# Altium PCB phone_cover_layout.PcbDoc
Units mm, origin at the board's own origin, x right, y up, seen from the top; angles counter-clockwise.
Board outline 43.69 x 67.82 mm, 2 copper layers (Top Layer, Bottom Layer); 76 components, 40 nets, 288 pads, 44 vias.
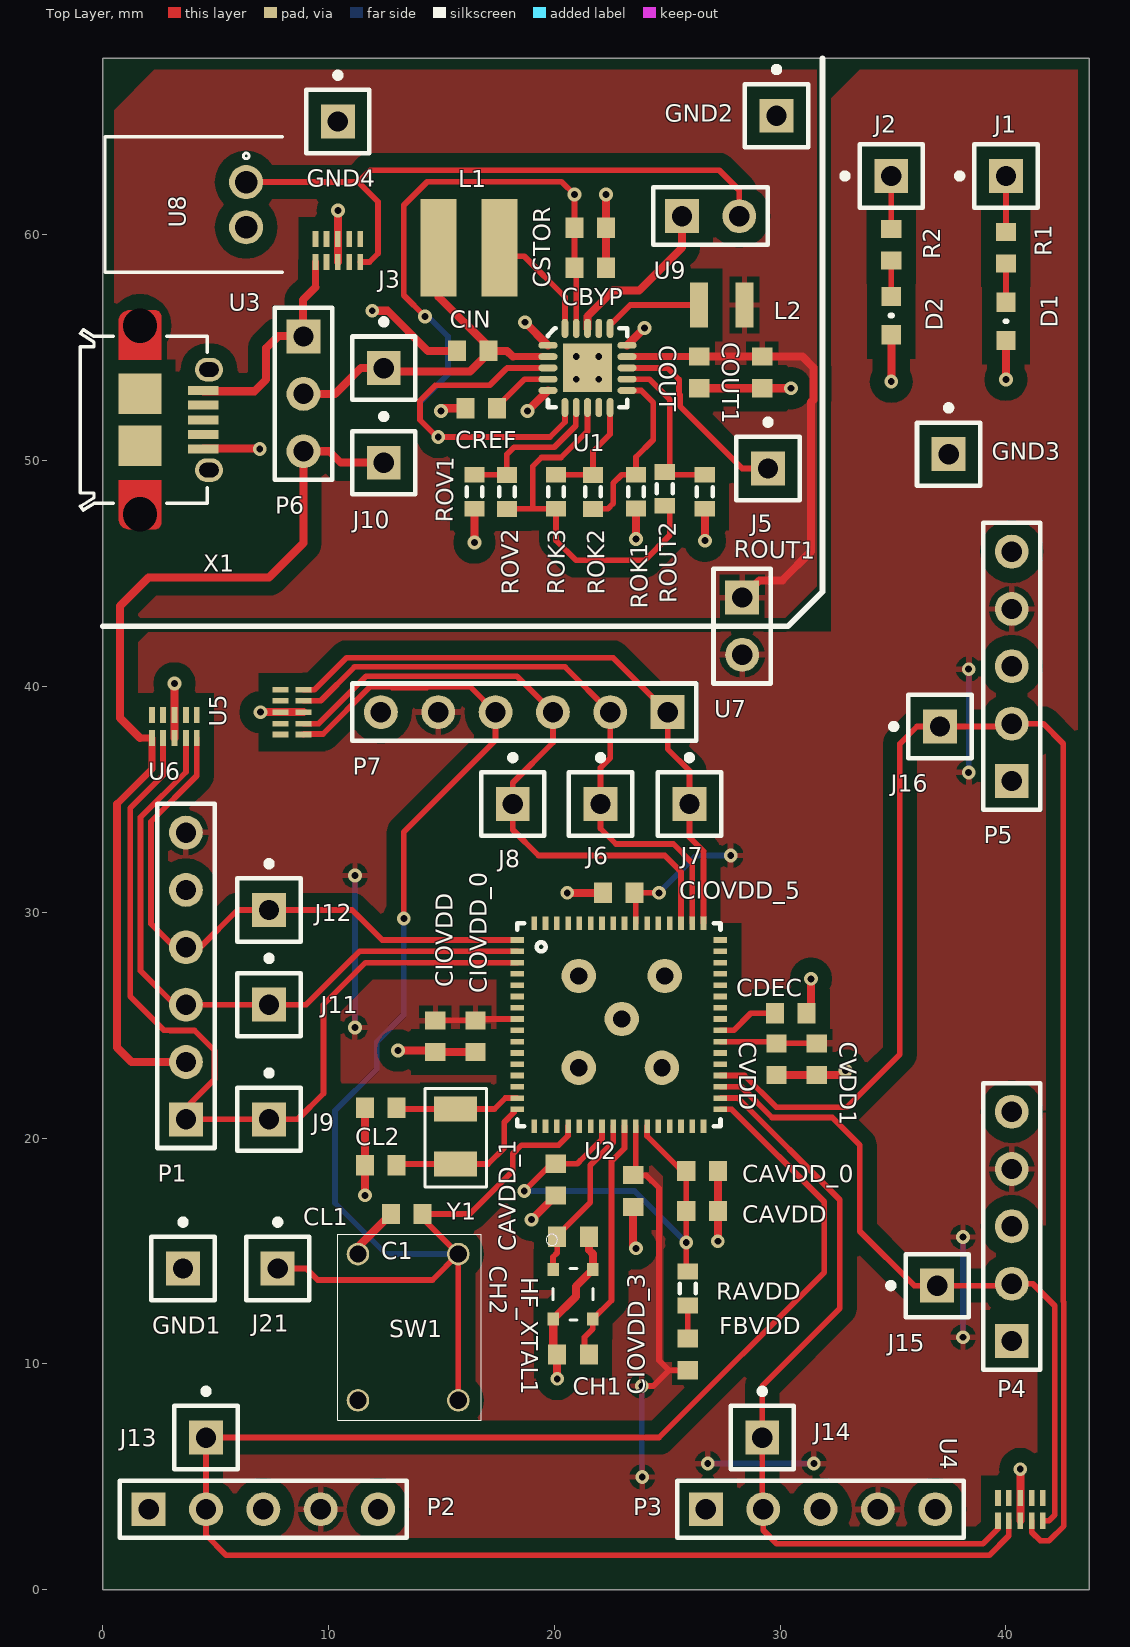
[diagram p0: Top Layer view]
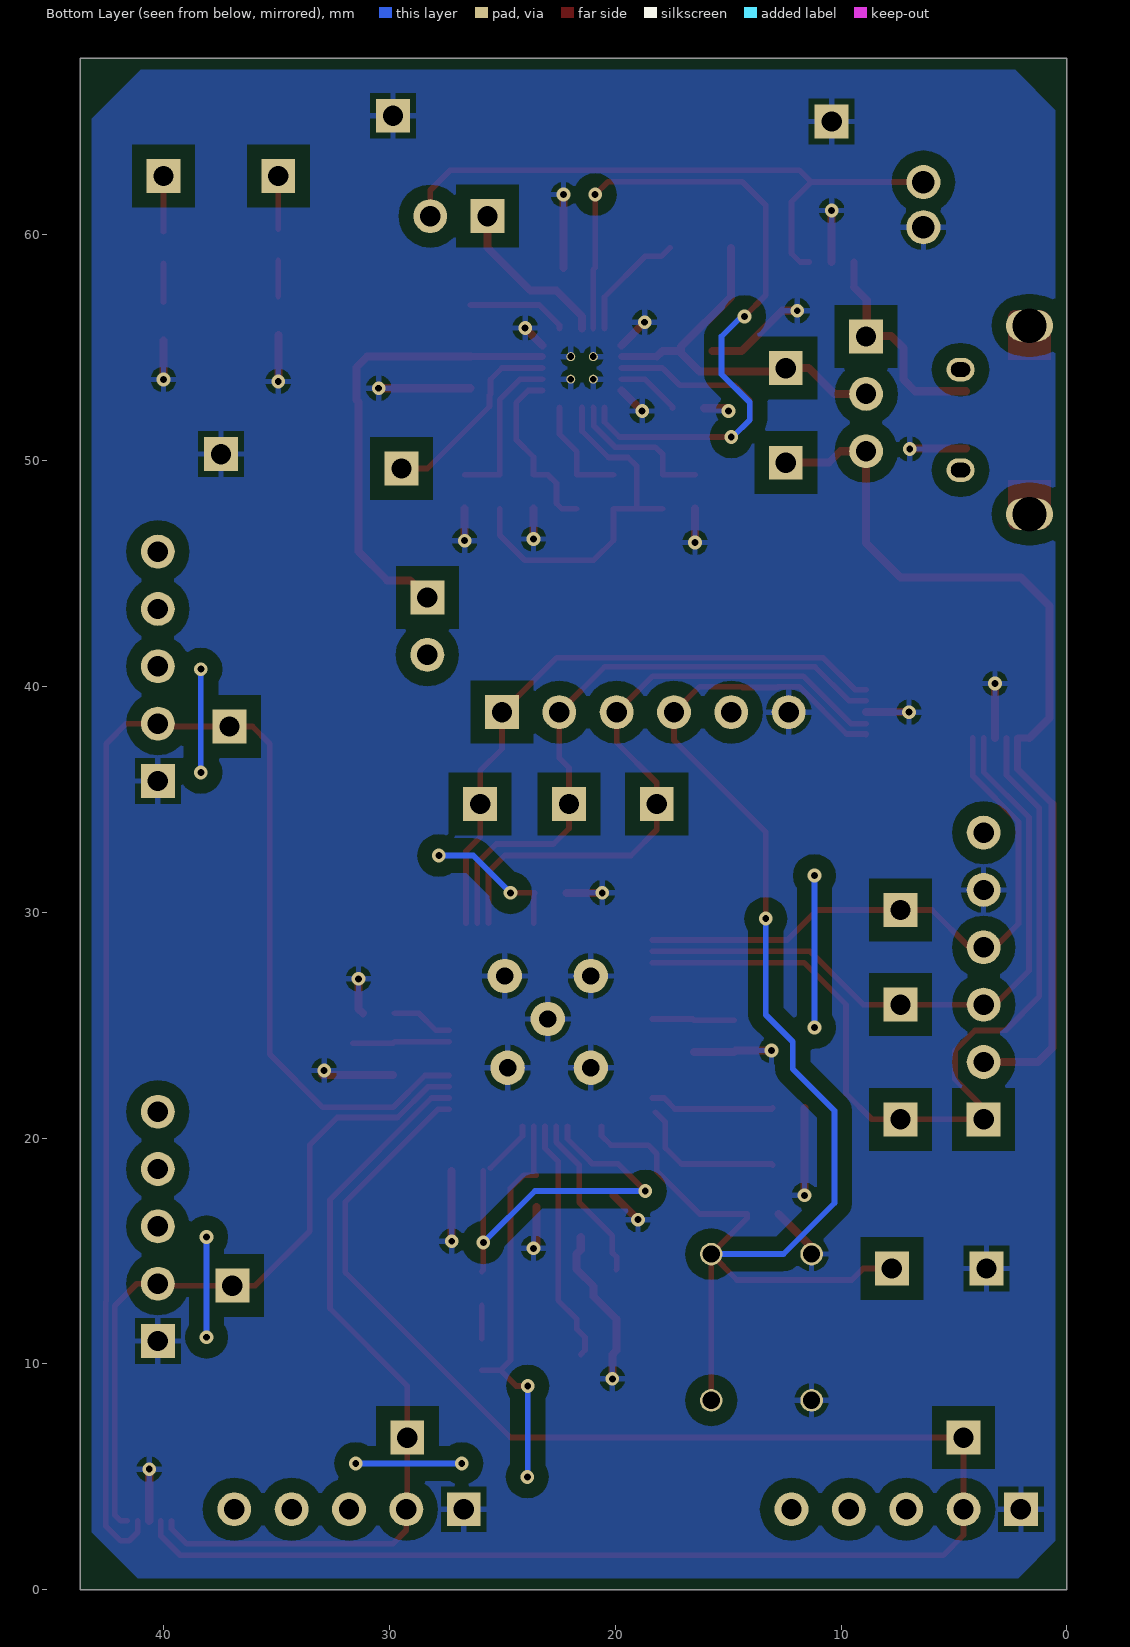
[diagram p1: Bottom Layer view, seen from below]

## Layer stack, top to bottom
Top Solder: solder mask 0.0102, Solder Resist, Dk 3.5
Top Layer: signal copper 0.0356
Dielectric 1: dielectric 0.32, FR-4, Dk 4.8
Bottom Layer: signal copper 0.0356
Bottom Solder: solder mask 0.0102, Solder Resist, Dk 3.5

## Board outline
0,0 43.688,0 43.688,67.818 0,67.818

## Design rules (kind name [scope] priority, off if disabled: settings)
Clearance [All] p1: gap=0.254 ignorepadtopadclearanceinfootprint=TRUE except(0: Arc-Hole Track-Hole SMDPad-Hole THPad-Hole Via-Hole Fill-Hole Poly-Hole Region-Hole Text-Hole; 0.152: Arc-SMDPad Track-Track Track-SMDPad SMDPad-SMDPad; 0.203: Arc-Track; 0.508: Arc-Via Track-Via THPad-Via Via-Via; 0.635: Arc-Poly Track-Poly SMDPad-Poly THPad-Poly Via-Poly Fill-Poly Poly-Poly)
HoleSize [All] p1: absolutevalues=TRUE maxlimit=2.54 minlimit=0.3 maxpercent=80.000 minpercent=20.000
MinimumSolderMaskSliver MinimumSolderMaskSliver_ESD [HasFootprint('SON50P100X255X50-10N')] p1: minsoldermaskwidth=0.025
MinimumSolderMaskSliver [All] p2: minsoldermaskwidth=0.025
PolygonConnect [All] p1: connectstyle=Relief reliefconductorwidth=0.254 reliefentries=4 polygonreliefangle="90 Angle" airgapwidth=0.254
RoutingVias [All] p1: holewidth=0.305 width=0.61 viastyle="Through Hole" minholewidth=0.254 minwidth=0.508 maxholewidth=0.356 maxwidth=0.711
ShortCircuit ShortCircuit_USB [InComponent('X1')] p1: allowed=TRUE
ShortCircuit [All] p2: allowed=FALSE
SilkToSolderMaskClearance SilkToSolderMaskClearance_XTAL [InComponent('HF_XTAL1')] p1: minsilkscreentomaskgap=0 clearancetoexposedcopper=TRUE
SilkToSolderMaskClearance [IsPad] p2: minsilkscreentomaskgap=0.076 clearancetoexposedcopper=TRUE
SolderMaskExpansion [All] p1: expansion=0.102
Width Width_Power [(InNet('GND') OR InNet('VBAT') OR InNet('VIN_DC') OR InNet('VIN_USB') OR InNet('VOUT') OR InNet('VOUT_NFC'))] p1: maxlimit=0.356 minlimit=0.305 preferedwidth=0.356
Width Width_Signal [All] p2: maxlimit=0.305 minlimit=0.203 preferedwidth=0.254
26 further rules are at their usual default settings.

## Classes and differential pairs
component class MCU: C1 CAVDD CAVDD_0 CAVDD_1 CDEC CH1 CH2 CIOVDD CIOVDD_0 CIOVDD_3 CIOVDD_5 CL1 CL2 CVDD CVDD1 FBVDD HF_XTAL1 J21 RAVDD SW1 U2 Y1
component class Peripherals: GND1 GND2 GND3 GND4 J6 J7 J8 J9 J10 J11 J12 J13 J14 J15 J16 P1 P2 P3 P4 P5 P7 U3 U4 U5 U6
component class Power: CBYP CIN COUT COUT1 CREF CSTOR D1 D2 J1 J2 J3 J5 L1 L2 P6 R1 R2 ROK1 ROK2 ROK3 ROUT1 ROUT2 ROV1 ROV2 U1 U7 U8 U9 X1

## Components (designator, comment, footprint, x,y, rotation, side; value= is the part's Value field where it differs from the comment)
C1 "Cap Semi" 1608[0603] 13.462,16.637 r0 top value=0.1uF
CAVDD "Cap Semi" 1608[0603] 26.543,16.764 r180 top value=10uF
CAVDD_0 "Cap Semi" 1608[0603] 26.543,18.542 r180 top value=10nF
CAVDD_1 "Cap Semi" 1608[0603] 20.066,18.161 r90 top value=10nF
CBYP "Cap Semi" 1608[0603] 21.59,58.547 r180 top value=100pF
CDEC "Cap Semi" 1608[0603] 30.48,25.527 r180 top value=1uF
CH1 "Cap Semi" 1608[0603] 20.828,10.414 r0 top value=1uF
CH2 "Cap Semi" 1608[0603] 20.828,15.621 r180 top value=1uF
CIN "Cap Semi" 1608[0603] 16.383,54.864 r180 top value=4.7uF
CIOVDD "Cap Semi" 1608[0603] 14.732,24.511 r90 top value=10uF
CIOVDD_0 "Cap Semi" 1608[0603] 16.51,24.511 r90 top value=0.1uF
CIOVDD_3 "Cap Semi" 1608[0603] 23.495,17.653 r90 top value=0.1uF
CIOVDD_5 "Cap Semi" 1608[0603] 22.86,30.861 r0 top value=0.1uF
CL1 "Cap Semi" 1608[0603] 12.319,18.796 r0 top value=1uF
CL2 "Cap Semi" 1608[0603] 12.319,21.336 r0 top value=1uF
COUT "Cap Semi" 1608[0603] 26.416,53.91 r90 top value=100pF
COUT1 "Cap Semi" 1608[0603] 29.21,53.91 r90 top value=10uF
CREF "Cap Semi" 1608[0603] 16.764,52.324 r0 top value=10nF
CSTOR "Cap Semi" 1608[0603] 21.59,60.325 r180 top value=100pF
CVDD "Cap Semi" 1608[0603] 29.845,23.495 r90 top value=10uF
CVDD1 "Cap Semi" 1608[0603] 31.623,23.495 r90 top value=0.1uF
D1 "LED0" LED1 40.005,56.173 r270 top
D2 "LED0" LED1 34.925,56.427 r270 top
FBVDD "Inductor" 1608[0603] 25.908,10.414 r270 top value=1kohm
GND1 "Socket" PIN1 3.556,14.224 r0 top
GND2 "Socket" PIN1 29.845,65.278 r0 top
GND3 "Socket" PIN1 37.465,50.292 r0 top
GND4 "Socket" PIN1 10.414,65.024 r0 top
HF_XTAL1 "Crystal_OSC" HFXTAL 20.828,13.081 r270 top
J1 "Socket" PIN1 40.005,62.611 r90 top
J2 "Socket" PIN1 34.925,62.611 r90 top
J3 "Socket" PIN1 12.446,54.102 r0 top
J5 "Socket" PIN1 29.464,49.657 r0 top
J6 "Socket" PIN1 22.047,34.798 r0 top
J7 "Socket" PIN1 25.984,34.798 r0 top
J8 "Socket" PIN1 18.161,34.798 r0 top
J9 "Socket" PIN1 7.366,20.828 r0 top
J10 "Socket" PIN1 12.446,49.911 r0 top
J11 "Socket" PIN1 7.366,25.908 r0 top
J12 "Socket" PIN1 7.366,30.099 r0 top
J13 "Socket" PIN1 4.572,6.731 r0 top
J14 "Socket" PIN1 29.21,6.731 r0 top
J15 "Socket" PIN1 36.957,13.462 r90 top
J16 "Socket" PIN1 37.084,38.227 r90 top
J21 "Socket" PIN1 7.747,14.224 r0 top
L1 "Inductor" IND_22uH 16.129,59.182 r90 top value="22 uH"
L2 "Inductor" IND_10uH 25.248,56.896 r180 top value=10uH
P1 "Header 6" HDR1X6 3.683,20.828 r90 top
P2 "Touch1" HDR1X5 2.032,3.556 r0 top
P3 "Touch2" HDR1X5 26.712,3.556 r0 top
P4 "Touch3" HDR1X5 40.259,11.007 r90 top
P5 "Touch4" HDR1X5 40.259,35.814 r90 top
P6 "Header 3" HDR1X3 8.89,55.499 r270 top
P7 "Header 6" HDR1X6 25.019,38.862 r180 top
R1 "Res1" 1608[0603] 40.005,59.436 r90 top
R2 "Res1" 1608[0603] 34.925,59.563 r90 top
RAVDD "Res3" J1-0603 25.908,13.335 r270 top value=1ohm
ROK1 "Res3" J1-0603 23.622,48.629 r90 top value=4.12M
ROK2 "Res3" J1-0603 21.717,48.617 r90 top value=8.25M
ROK3 "Res3" J1-0603 20.077,48.625 r270 top value=634K
ROUT1 "Res3" J1-0603 26.67,48.625 r90 top value=5.23M
ROUT2 "Res3" J1-0603 24.892,48.756 r270 top value=7.77M
ROV1 "Res3" J1-0603 16.463,48.625 r90 top value=5.62M
ROV2 "Res3" J1-0603 17.907,48.617 r270 top value=7.32M
SW1 "Switch-PTS645" Switch 13.589,11.938 r90 top
U1 "BQ25570RGRR" QFN50P350X350X100-21N 21.471,54.11 r0 top
U2 "EFM32G232F128-QFP64" QFN-64 22.86,25.019 r0 top
U3 "IP4292CZ10-TBR" SON50P100X255X50-10N 10.414,59.309 r90 top
U4 "IP4292CZ10-TBR" SON50P100X255X50-10N 40.64,3.556 r90 top
U5 "IP4292CZ10-TBR" SON50P100X255X50-10N 8.382,38.862 r180 top
U6 "IP4292CZ10-TBR" SON50P100X255X50-10N 3.175,38.227 r90 top
U7 "Header 2" HDR1X2 28.321,43.942 r270 top
U8 "JST_Conn" JST 6.35,61.341 r0 top
U9 "Header 2" HDR1X2 25.654,60.833 r0 top
X1 "MicroB" 629105150921 1.651,51.809 r270 top
Y1 "XTAL" LFXTAL 15.621,20.066 r90 top

## Footprints (in the part's own frame and the unit in brackets; to place one, negate y for a bottom-side part, rotate by r counter-clockwise, add the part's x,y. Pads: shape width x height; smd on the part's side, far side on the other; paste and mask are expansions set on the pad)
1608[0603] [mm] "Chip Capacitor, Body 1.6x0.8mm, IPC High Density"
  rect 0.8x0.9 smd: 1(-0.7,0) 2(0.7,0)
  body extent -0.87,-0.48 0.87,0.48, height 1.3
629105150921 [mm]
  rect 0.4x1.35 smd: 1(-1.3,2.805) 2(-0.65,2.805) 3(0,2.805) 4(0.65,2.805) 5(1.3,2.805)
  oval 1.05x1.25 hole 0.65 slot 0.85 at 90 deg: S1(-2.225,3.055) S2(2.225,3.055)
  round 0 / inner round 0 / far side oval 1.4x2.1 hole 1.524: S3(-4.175,0) S6(4.175,0)
  rect 1.8x1.9 smd: S4(-1.15,0) S5(1.15,0)
  Top Layer region: -4.353,-0.95 -4.452,-0.95 -4.636,-0.874 -4.776,-0.733 -4.852,-0.549 -4.852,-0.45 -4.852,-0.45 -4.852,0.65 -4.852,0.71 -4.807,0.82 -4.722,0.904 -4.612,0.95 -4.553,0.95 -4.553,0.95 -2.668,0.95 -2.668,-0.95
  Top Layer region: 4.353,-0.95 4.452,-0.95 4.636,-0.874 4.776,-0.733 4.852,-0.549 4.852,-0.45 4.852,-0.45 4.852,0.65 4.852,0.71 4.807,0.82 4.722,0.904 4.612,0.95 4.553,0.95 4.553,0.95 2.668,0.95 2.668,-0.95
  silkscreen extent -4,-2.64 4,2.97, body extent -4.3,-2.64 4.3,3.23, height 2.78
HDR1X2 [mm] "Connector; Header; 2 Position"
  rect 1.5x1.5 hole 0.9: 1(0,0)
  round 1.5 hole 0.9: 2(2.54,0)
  silkscreen extent -1.27,-1.27 3.81,1.27
HDR1X3 [mm] "Connector; Header; 3 Position"
  rect 1.5x1.5 hole 0.9: 1(0,0)
  round 1.5 hole 0.9: 2(2.54,0) 3(5.08,0)
  silkscreen extent -1.27,-1.27 6.35,1.27
HDR1X5 [mm] "Connector; Header; 5 Position"
  rect 1.5x1.5 hole 0.9: 1(0,0)
  round 1.5 hole 0.9: 2(2.54,0) 3(5.08,0) 4(7.62,0) 5(10.16,0)
  silkscreen extent -1.27,-1.27 11.43,1.27
HDR1X6 [mm] "Connector; Header; 6 Position"
  rect 1.5x1.5 hole 0.9: 1(0,0)
  round 1.5 hole 0.9: 2(2.54,0) 3(5.08,0) 4(7.62,0) 5(10.16,0) 6(12.7,0)
  silkscreen extent -1.27,-1.27 13.97,1.27
HFXTAL [mm]
  rect 0.57x0.49 smd: 1(-1.1,-0.875) 2(1.1,-0.875) 3(1.1,0.875) 4(-1.1,0.875)
  silkscreen extent -2.66,-1.19 1.14,0.89
IND_10uH [mm]
  rect 0.8x2 smd: 1(-3.175,0) 2(-1.168,0)
IND_22uH [mm]
  rect 4.3x1.6 smd: 1(0.25,1.25) 2(0.25,-1.45)
J1-0603 [mm] "Chip Resistor, Body 1.6x0.8mm, IPC High Density"
  rect 0.7x0.9 smd: 1(-0.75,0) 2(0.75,0)
  silkscreen extent -0.2,-0.35 0.2,0.35, body extent -0.85,-0.48 0.85,0.48, height 0.9
JST [mm]
  round 1.508 hole 1: 1(0,1) 2(0,-1)
  silkscreen extent -6.25,-3 1.6,3
LED1 [mm]
  rect 0.85x0.85 smd: 1(-0.85,0) 2(0.85,0)
  silkscreen extent 0,-0.03 0,0.03
LFXTAL [mil]
  rect 43x75 smd: 1(-48,0) 2(48,0)
  silkscreen extent -88,-54 84,53
PIN1 [mm] "Connector; Plug"
  rect 1.5x1.5 hole 0.9: 1(0,0)
  silkscreen extent -1.4,-1.4 1.4,2.17
QFN50P350X350X100-21N [mm]
  oval 0.85x0.3 smd: 1(-1.75,1) 2(-1.75,0.5) 3(-1.75,0) 4(-1.75,-0.5) 5(-1.75,-1) 11(1.75,-1) 12(1.75,-0.5) 13(1.75,0) 14(1.75,0.5) 15(1.75,1)
  oval 0.3x0.85 smd: 6(-1,-1.75) 7(-0.5,-1.75) 8(0,-1.75) 9(0.5,-1.75) 10(1,-1.75) 16(1,1.75) 17(0.5,1.75) 18(0,1.75) 19(-0.5,1.75) 20(-1,1.75)
  rect 2.15x2.15 smd: 21(0,0)
  round 0.4 hole 0.3: 22(-0.5,0.5) 23(-0.5,-0.5) 24(0.5,-0.5) 25(0.5,0.5)
  silkscreen extent -1.75,-1.75 1.75,1.75
QFN-64 [mm]
  rect 0.6x0.25 smd: 1(-4.5,3.75) 2(-4.5,3.25) 3(-4.5,2.75) 4(-4.5,2.25) 5(-4.5,1.75) 6(-4.5,1.25) 7(-4.5,0.75) 8(-4.5,0.25) 9(-4.5,-0.25) 10(-4.5,-0.75) 11(-4.5,-1.25) 12(-4.5,-1.75) 13(-4.5,-2.25) 14(-4.5,-2.75) 15(-4.5,-3.25) 16(-4.5,-3.75) 33(4.5,-3.75) 34(4.5,-3.25) 35(4.5,-2.75) 36(4.5,-2.25) 37(4.5,-1.75) 38(4.5,-1.25) 39(4.5,-0.75) 40(4.5,-0.25) 41(4.5,0.25) 42(4.5,0.75) 43(4.5,1.25) 44(4.5,1.75) 45(4.5,2.25) 46(4.5,2.75) 47(4.5,3.25) 48(4.5,3.75)
  rect 0.25x0.6 smd: 17(-3.75,-4.5) 18(-3.25,-4.5) 19(-2.75,-4.5) 20(-2.25,-4.5) 21(-1.75,-4.5) 22(-1.25,-4.5) 23(-0.75,-4.5) 24(-0.25,-4.5) 25(0.25,-4.5) 26(0.75,-4.5) 27(1.25,-4.5) 28(1.75,-4.5) 29(2.25,-4.5) 30(2.75,-4.5) 31(3.25,-4.5) 32(3.75,-4.5) 49(3.75,4.5) 50(3.25,4.5) 51(2.75,4.5) 52(2.25,4.5) 53(1.75,4.5) 54(1.25,4.5) 55(0.75,4.5) 56(0.25,4.5) 57(-0.25,4.5) 58(-0.75,4.5) 59(-1.25,4.5) 60(-1.75,4.5) 61(-2.25,4.5) 62(-2.75,4.5) 63(-3.25,4.5) 64(-3.75,4.5)
  silkscreen extent -4.5,-4.5 4.5,4.5
SON50P100X255X50-10N [mil]
  rect 28x10 smd: 1(-20,39) 2(-20,20) 3(-20,0) 4(-20,-20) 5(-20,-39) 6(20,-39) 7(20,-20) 8(20,0) 9(20,20) 10(20,39)
Switch [mil]
  round 39.37 hole 30: 1(-140,90) 2(115,90) 3(-140,-85) 4(115,-85)
  silkscreen extent -175,-125 150,125

## Part data
C1 CAVDD CAVDD_0 CAVDD_1 CBYP CDEC CH1 CH2 CIN CIOVDD CIOVDD_0 CIOVDD_3 CIOVDD_5 CL1 CL2 COUT COUT1 CREF CSTOR CVDD CVDD1: "Capacitor (Semiconductor SIM Model)", LatestRevisionDate=29-May-2009, LatestRevisionNote="IPC-7351 Footprint Added.", PackageDescription="Chip Capacitor", PackageReference=C1206, Published=8-Jun-2000, Publisher="Altium Limited"
D1 D2: "Typical INFRARED GaAs LED", Digi-Key Part Number=P13484CT-ND, Manufacturer="Panasonic Electronic Components", Manufacturer Part Number=LNJ926W8CRA, Component URL=https://industrial.panasonic.com/content/data/SC/ds/ds4/LNJ926W8CRA_E.pdf, Component URL Description=Datasheet
HF_XTAL1: Digi-Key Part Number=1253-1120-1-ND, Manufacturer="AVX Corp/Kyocera Corp", Manufacturer Part Number=CX2016DB40000D0FLJCC, Component URL=https://media.digikey.com/pdf/Data%20Sheets/Optrex%20PDFs/CX2016DB_Series_Spec.pdf, Component URL Description=Datasheet
P1 P7: "Header, 6-Pin", LatestRevisionDate=17-Jul-2002, LatestRevisionNote="Re-released for DXP Platform.", Publisher="Altium Limited"
P2 P3 P4 P5: library part "Header 5", "Header, 5-Pin", LatestRevisionDate=17-Jul-2002, LatestRevisionNote="Re-released for DXP Platform.", Publisher="Altium Limited"
P6: "Header, 3-Pin", LatestRevisionDate=17-Jul-2002, LatestRevisionNote="Re-released for DXP Platform.", Publisher="Altium Limited"
R1 R2: "Resistor", Digi-Key Part Number=311-143HRCT-ND, Manufacturer=Yageo, Manufacturer Part Number=RC0603FR-07143RL, Component URL=http://www.yageo.com/documents/recent/PYu-RC_Group_51_RoHS_L_8.pdf, Component URL Description=Datasheet
RAVDD ROK1 ROK2 ROK3 ROUT1 ROUT2 ROV1 ROV2: "Resistor", LatestRevisionDate=29-May-2009, LatestRevisionNote="IPC-7351 Footprint Added.", PackageDescription="Chip Resistor", PackageReference=J1-0603, Published=8-Jun-2000, Publisher="Altium Limited"
SW1: Digi-Key Part Number=CKN9112CT-ND, Manufacturer=C&K, Manufacturer Part Number="PTS645SM43SMTR92 LFS", Component URL=http://www.ckswitches.com/media/1471/pts645.pdf, Component URL Description=Datasheet
U1: "Ultra Low Power Harvester Power Management IC with Boost Charger, and Nanopower Buck Converter 20-VQFN", Package="VQFN-20 Texas Instruments", Availability=Unavailable, MF="Texas Instruments", MP=BQ25570RGRR, Price=None, SnapEDA_Link=https://www.snapeda.com/parts/BQ25570RGRR/Texas%20Instruments/view-part/?ref=snap
U2: "MCU 32-bit EFM32 ARM Cortex M3 RISC 128KB Flash 2.5V/3.3V 64-Pin TQFP T/R", Package="TQFP-64 Silicon Labs", Availability=Unavailable, MF="Silicon Labs", MP=EFM32G232F128-QFP64, Price=None, SnapEDA_Link=https://www.snapeda.com/parts/EFM32G232F128-QFP64/Silicon%20Labs/view-part/?ref=snap
U3 U4 U5 U6: "DIODE, ESD, 4 CH, USB, HDMI, SOT1176; Diode Type: ESD Protection; Operating Voltage: 5.5V; No. of Pins: 10", Package=None, Availability=Unavailable, MF="NXP Semiconductors", MP=IP4292CZ10-TBR, Price=None, SnapEDA_Link=https://www.snapeda.com/parts/IP4292CZ10-TBR/NXP%20Semiconductors/view-part/?ref=snap
U7 U9: "Header, 2-Pin", LatestRevisionDate=17-Jul-2002, LatestRevisionNote="Re-released for DXP Platform.", Publisher="Altium Limited"
X1: library part USBMICRO_20329, "USB ConnectorsUSBMINIB - Surface Mount Female Mini-B USB Connector    4UConnector: 06564", Manufacturer="Amphenol FCI", ManufacturerPartNo=10103594-0001LF, SupplierPartNo=609-4050-1-ND, ComponentLink1Description=Datasheet, ComponentLink1URL=http://cdn.amphenol-icc.com/media/wysiwyg/files/documentation/datasheet/inputoutput/io_usb_micro.pdf, Supplier=Digi-Key, SupplierLink1URL=https://www.digikey.com/product-detail/en/amphenol-fci/10103594-0001LF/609-4050-1-ND/2350357
Y1: "Crystal Oscillator", Digi-Key Part Number=535-9543-1-ND, Manufacturer="Abracon LLC", Manufacturer Part Number=ABS07-32.768KHZ-7-T, Component URL=http://www.abracon.com/Resonators/ABS07.pdf, Component URL Description=Datasheet
FBVDD L1 L2: Code_IEC=1005, Code_JEITA=0402, LatestRevisionDate=29-May-2009, LatestRevisionNote="IPC-7351 Footprint Added.", PackageDescription="Chip Inductor", PackageReference=0402-A, Published=8-Jun-2000, Publisher="Altium Limited"
GND1 GND2 GND3 GND4 J1 J2 J3 J5 J6 J7 J8 J9 J10 J11 J12 J13 J14 J15 J16 J21: LatestRevisionDate=17-Jul-2002, LatestRevisionNote="Re-released for DXP Platform.", Publisher="Altium Limited"

## Free pads (board coordinates)
  round 1.524 hole 0.762: 7(21.082,27.178) 8(24.892,27.178) 9(21.082,23.114) 10(24.765,23.114) 11(22.987,25.273)

## Via types
v1: diameter 0.61, hole 0.305, Top Layer to Bottom Layer, 44 vias

## Nets (pads, with @x,y where several pads share a name; then routed paths per layer and width w, separated by ;. In a path a pad name is that pad's centre, name@x,y a point inside that pad or via, vN(x,y) a via of type N, cw(c..) or ccw(c..) an arc to the next point about the centre after c; other vN are vias at no path point)
AVDD_0: CAVDD.2 CAVDD_0.2 CAVDD_1.2 RAVDD.1 U2.23 U2.27 | length 20
  Top Layer w0.254: v1(18.669,17.653) 19.877,18.861 CAVDD_1.2 21.02,18.861 21.133,18.974 21.133,18.985 22.11,19.963 U2.23 ; U2.27 24.11,20.086 CAVDD_0.2@25.527,18.669 ; CAVDD_0.2 CAVDD.2 v1(25.843,15.367) 25.843,14.15 RAVDD.1
  Bottom Layer w0.254: v1(18.669,17.653) 23.557,17.653 v1(25.843,15.367)
FD: J9.1 P1.1 U2.3 U6.2 | length 40.9
  Top Layer w0.254: U6.2 2.667,36.068 1.219,34.62 1.219,26.264 2.707,24.777 2.973,24.777 2.984,24.765 4.064,24.765 4.953,23.876 4.953,22.606 3.175,20.828 P1.1 J9.1 8.636,20.828 9.779,21.971 9.779,25.908 11.64,27.769 U2.3
GND: C1.1 CAVDD.1 CAVDD_0.1 CAVDD_1.1 CBYP.1 CDEC.1 CH1.1 CH2.1 CIN.2 CIOVDD.1 CIOVDD_0.1 CIOVDD_3.1 CIOVDD_5.1 CL1.1 CL2.1 COUT1.1 COUT.1 CREF.1 CSTOR.1 CVDD1.1 CVDD.1 D1.2 D2.2 GND1.1 GND2.1 GND3.1 GND4.1 HF_XTAL1.2 HF_XTAL1.4 P1.5 P2.1 P3.1 P4.1 P5.1 P7.6 pad.7 pad.8 pad.9 pad.10 pad.11 ROK1.1 ROUT1.1 ROV1.1 SW1.1 SW1.2 U1.1 U1.5 U1.15 U1.21 U1.22 U1.23 U1.24 U1.25 U3.3 U3.8 U4.3 U4.8 U5.3 U5.8 U6.3 U6.8 U8.2 X1.5 | length 65.9
  Top Layer w0.356: U6.3 U6.8 v1(3.175,40.132) ; X1.5@4.456,50.541 6.93,50.541 v1(6.955,50.516) ; v1(6.985,38.862) U5.8 U5.3 ; U3.3 U3.8 v1(10.414,61.087) ; SW1.2@11.303,15.178 C1.1 ; v1(11.619,17.461) CL1.1 CL2.1 ; v1(11.938,56.642) 12.62,56.642 14.398,54.864 CIN.2 ; v1(13.081,23.876) 14.667,23.876 CIOVDD.1 CIOVDD_0.1 ; v1(14.986,52.197) 15.113,52.324 CREF.1 ; v1(16.463,46.378) ROV1.1 ; v1(18.697,56.134) U1.1 ; v1(18.808,52.197) U1.5 ; v1(18.988,16.383) CAVDD_1.1 ; v1(20.128,9.333) CH1.1 19.953,10.589 HF_XTAL1.2 20.955,12.983 20.955,13.433 HF_XTAL1.4 21.717,14.195 21.717,14.859 21.528,15.048 CH2.1 ; v1(20.574,30.861) CIOVDD_5.1 ; CBYP.1 CSTOR.1 v1(22.29,61.787) ; U1.15 v1(23.991,55.88) ; CIOVDD_3.1 23.495,15.24 v1(23.622,15.113) ; v1(23.622,46.531) ROK1.1 ; COUT.1 COUT1.1 v1(30.48,53.21) ; v1(26.67,46.458) ROUT1.1 ; v1(27.243,15.429) CAVDD.1 CAVDD_0.1 ; CVDD.1 CVDD1.1 32.955,22.795 32.955,22.925 33.017,22.987 v1(32.893,22.987) ; CDEC.1 31.369,25.716 v1(31.369,27.051) ; v1(34.925,53.506) D2.2 ; v1(40.005,53.594) D1.2 ; U4.3 U4.8 v1(40.64,5.334)
HFXTAL_N: CH1.2 HF_XTAL1.3 U2.25 | length 10.9
  Top Layer w0.254: CH1.2 21.336,10.606 21.336,11.176 21.703,11.543 HF_XTAL1.3 22.53,12.808 22.53,18.974 23.107,19.551 23.107,19.94 23.11,19.943 U2.25
HFXTAL_P: CH2.2 HF_XTAL1.1 U2.24 | length 7.5
  Top Layer w0.254: HF_XTAL1.1 19.939,14.195 19.939,14.732 20.128,14.921 CH2.2 20.128,15.683 21.59,17.145 21.59,18.796 22.61,19.816 U2.24
IOVDD_0: CIOVDD.2 CIOVDD_0.2 CIOVDD_3.2 CIOVDD_5.2 CVDD1.2 CVDD.2 FBVDD.2 P1.6 P2.4 P3.4 P4.4 P5.4 P7.5 U2.8 U2.26 U2.39 U2.55 U7.2 | length 53
  Top Layer w0.254: CIOVDD.2 CIOVDD_0.2 16.568,25.269 U2.8 ; U2.26 23.61,18.468 CIOVDD_3.2 24.065,18.353 24.638,17.78 24.638,10.16 25.084,9.714 ; U2.55 23.61,30.811 CIOVDD_5.2 v1(24.638,30.861) ; v1(23.876,9.017) 24.387,9.017 25.084,9.714 ; FBVDD.2 25.084,9.714 ; U2.39 29.771,24.269 CVDD.2 CVDD1.2 ; v1@37.973,11.176 v1(38.1,11.176)
  Bottom Layer w0.254: v1(11.176,24.892) v1(11.176,31.623) ; v1(23.876,9.017) 23.876,5.007 v1(23.894,4.989) ; v1(24.638,30.861) 26.289,32.512 v1(27.813,32.512) ; v1(26.797,5.588) v1(31.496,5.588) ; v1(38.1,11.176) v1(38.1,15.621) ; v1(38.354,36.195) v1(38.354,40.767)
LFXTAL_N: CL1.2 U2.16 Y1.1 | length 6.8
  Top Layer w0.254: CL1.2 13.07,18.847 Y1.1 17.069,18.847 17.78,19.558 17.78,20.701 18.221,21.142
LFXTAL_P: CL2.2 U2.15 Y1.2 | length 5.6
  Top Layer w0.254: CL2.2 13.07,21.285 Y1.2 17.348,21.285 17.832,21.769 U2.15
NetCDEC_2: CDEC.2 U2.40 | length 2.7
  Top Layer w0.254: U2.40 27.944,24.769 28.702,25.527 CDEC.2
NetCREF_2: CREF.2 U1.4 | length 2.8
  Top Layer w0.254: CREF.2 17.464,52.389 18.685,53.61 U1.4
NetD1_1: D1.1 R1.1 | length 1.7
  Top Layer w0.254: D1.1 R1.1
NetD2_1: D2.1 R2.1 | length 1.6
  Top Layer w0.254: D2.1 R2.1
NetFBVDD_1: FBVDD.1 RAVDD.2 | length 1.5
  Top Layer w0.254: FBVDD.1 RAVDD.2
NetJ1_1: J1.1 R1.2 | length 2.5
  Top Layer w0.254: R1.2 J1.1
NetJ2_1: J2.1 R2.2 | length 2.3
  Top Layer w0.254: R2.2 J2.1
NetJ5_1: J5.1 U1.13 | length 8.8
  Top Layer w0.254: U1.13 25.011,54.11 25.527,53.594 25.527,52.945 25.574,52.898 25.574,52.404 28.321,49.657 J5.1
NetL1_2: L1.2 U1.20 | length 5.2
  Top Layer w0.254: L1.2 17.956,59.055 18.669,59.055 20.471,57.253 U1.20
NetL2_2: L2.2 U1.16 | length 4.5
  Top Layer w0.254: U1.16 22.471,55.999 23.368,56.896 L2.2
OK_HYST: ROK2.2 ROK3.1 U1.10 | length 4.9
  Top Layer w0.254: ROK3.1 21.709,49.375 21.709,50.411 22.471,51.173 U1.10
OK_PROG: ROK1.2 ROK2.1 U1.11 | length 8
  Top Layer w0.254: ROK2.1 22.364,47.867 22.606,48.109 22.606,48.998 22.987,49.379 ROK1.2 23.622,50.165 24.384,50.927 24.384,52.578 23.852,53.11 U1.11
RESETn: C1.2 J21.1 P7.4 SW1.3 SW1.4 U2.20 U5.1 | length 67.3
  Top Layer w0.254: J21.1 9.017,14.224 9.525,13.716 14.605,13.716 SW1.4 ; U5.1 8.89,37.897 9.754,37.897 11.851,39.993 12.787,39.993 12.826,39.954 14.352,39.954 14.391,39.993 16.268,39.993 P7.4 17.399,37.617 13.335,33.553 v1(13.335,29.718) ; SW1.3 SW1.4 ; U2.20 20.61,20.102 20.193,19.685 18.542,19.685 18.161,19.304 18.161,18.542 16.256,16.637 C1.2 14.162,16.445 SW1.4
  Bottom Layer w0.254: v1(13.335,29.718) 13.335,25.459 12.141,24.265 12.141,23.063 10.287,21.209 10.287,17.121 12.549,14.859 SW1.4
SCL: J11.1 P1.3 U2.2 U6.4 | length 29.4
  Top Layer w0.254: U6.4 3.683,36.21 1.676,34.204 1.676,27.407 3.175,25.908 P1.3 J11.1 9.017,25.908 11.378,28.269 U2.2
SDA: J12.1 P1.4 U2.1 U6.5 | length 27
  Top Layer w0.254: U6.5 4.166,36.046 2.134,34.014 2.134,29.489 3.175,28.448 P1.4 4.318,28.448 5.969,30.099 J12.1 11.049,30.099 12.379,28.769 U2.1
SWCLK: J7.1 P7.1 U2.49 U5.5 | length 27.7
  Top Layer w0.254: U5.5 9.373,39.853 10.795,41.275 22.606,41.275 P7.1 25.019,37.236 25.984,36.271 J7.1 25.984,33.325 26.61,32.699 U2.49
SWDIO: J6.1 P7.2 U2.50 U5.4 | length 27.7
  Top Layer w0.254: U5.4 9.652,39.37 11.151,40.869 20.472,40.869 P7.2 22.479,36.83 22.047,36.398 J6.1 22.047,33.706 22.733,33.02 25.273,33.02 26.11,32.183 U2.50
SWO: J8.1 P7.3 U2.51 U5.2 | length 29
  Top Layer w0.254: U5.2 9.565,38.354 10.731,39.52 11.661,40.45 18.351,40.45 P7.3 19.939,37.516 18.161,35.738 J8.1 18.161,33.655 19.304,32.512 24.892,32.512 25.61,31.794 U2.51
Touch1: J13.1 P2.2 U2.33 U4.2 | length 81.1
  Top Layer w0.254: U2.33 27.86,21.269 31.953,17.176 31.953,14.046 24.638,6.731 J13.1 P2.2 4.572,2.413 5.461,1.524 39.27,1.524 40.132,2.386 U4.2
Touch2: J14.1 P3.2 U2.34 U4.1 | length 34.5
  Top Layer w0.254: U2.34 28.136,21.769 32.639,17.266 32.639,12.446 29.21,9.017 J14.1 29.21,3.598 P3.2 29.252,2.625 29.845,2.032 38.989,2.032 39.649,2.692 U4.1
Touch3: J15.1 P4.2 U2.35 U4.5 | length 31
  Top Layer w0.254: U2.35 28.282,22.269 29.647,20.904 32.309,20.904 33.528,19.685 33.528,15.875 35.941,13.462 J15.1 40.174,13.462 P4.2 41.19,13.547 42.164,12.573 42.164,3.302 41.91,3.048 U4.5
Touch4: J16.1 P5.2 U2.36 U4.4 | length 68.3
  Top Layer w0.254: U2.36 28.429,22.769 29.836,21.361 32.961,21.361 35.306,23.707 35.306,37.465 36.068,38.227 J16.1 40.132,38.227 P5.2 41.656,38.354 42.545,37.465 42.545,12.767 42.57,12.741 42.57,2.819 41.91,2.159 41.529,2.159 41.148,2.54 U4.4
VBAT: U1.18 U9.1 | length 7.4
  Top Layer w0.356: U1.18 21.471,56.396 22.606,57.531 23.749,57.531 25.654,59.436 U9.1
VBAT_OUT: U3.5 U8.1 U9.2 | length 28
  Top Layer w0.254: U8.1 11.319,62.341 ; U3.5 11.811,58.801 12.192,59.182 12.192,61.468 11.319,62.341 ; U9.2 28.194,61.976 27.305,62.865 11.843,62.865 11.319,62.341
VBAT_OV: ROV1.2 ROV2.1 U1.7 | length 6.7
  Top Layer w0.254: ROV1.2 17.899,49.375 17.899,50.284 18.212,50.597 20.001,50.597 20.951,51.547 20.951,52.34 U1.7
VIN_DC: CIN.1 J3.1 L1.1 P6.2 U1.2 | length 17.5
  Top Layer w0.305: 18.161,54.61 U1.2
  Top Layer w0.356: P6.2 10.287,52.959 11.43,54.102 J3.1 12.446,53.957 16.272,53.957 17.083,54.767 CIN.1 ; L1.1 14.879,57.257 17.083,55.053 CIN.1 ; 18.161,54.61 17.907,54.864 CIN.1
VIN_USB: P6.1 U3.1 X1.1 | length 9.7
  Top Layer w0.305: 9.423,57.683 U3.1
  Top Layer w0.356: X1.1@4.456,53.077 6.722,53.077 7.239,53.594 7.239,54.991 7.777,55.529 8.86,55.529 8.86,57.12 9.423,57.683
VOUT: COUT1.2 COUT.2 L2.1 U1.14 U7.1 | length 20.4
  Top Layer w0.305: U1.14 COUT.2
  Top Layer w0.356: COUT.2 COUT1.2 30.988,54.61 31.471,54.127 31.471,52.698 31.369,52.596 31.369,45.974 30.099,44.704 29.083,44.704 U7.1@28.448,44.069
VOUT_NFC: J10.1 P1.2 P6.3 U6.1 | length 41
  Top Layer w0.305: 0.635,34.798 2.184,36.347 U6.1 1.651,37.719
  Top Layer w0.356: 0.635,34.798 0.635,24.003 1.27,23.368 P1.2@3.175,23.368 ; 1.651,37.719 0.762,38.608 0.762,43.561 2.032,44.831 7.366,44.831 8.89,46.355 P6.3 10.033,50.419 10.541,49.911 J10.1
VOUT_SET: ROUT1.2 ROUT2.1 U1.12 | length 7.2
  Top Layer w0.254: U1.12 24.216,53.61 25.117,52.709 25.117,49.375 ROUT1.2
VRDIV: ROK3.2 ROUT2.2 ROV2.2 U1.8 | length 16.6
  Top Layer w0.254: ROV2.2 19.05,47.867 ; U1.8 21.471,51.31 20.301,50.14 19.43,50.14 19.05,49.76 19.05,47.867 ; ROUT2.2@25.117,47.875 25.117,46.697 24.011,45.591 20.957,45.591 20.077,46.471 ROK3.2 20.069,47.867 19.05,47.867
VSTOR: CBYP.2 CSTOR.2 U1.3 U1.6 U1.19 | length 40.9
  Top Layer w0.254: v1(14.275,56.388) 13.335,57.328 13.335,61.316 14.376,62.357 20.32,62.357 v1(20.89,61.787) CSTOR.2 CBYP.2 20.971,58.466 U1.19 ; 17.875,54.07 17.145,53.34 14.732,53.34 14.046,52.654 14.046,51.808 14.8,51.054 v1(14.859,51.054) 19.812,51.054 20.471,51.713 U1.6 ; 17.915,54.11 U1.3
  Bottom Layer w0.254: v1(14.275,56.388) 14.41,56.388 15.291,55.507 15.291,53.831 14.046,52.586 14.046,51.808 14.8,51.054 v1(14.859,51.054)
pads on no net: P2.3 P2.5 P3.3 P3.5 P4.3 P4.5 P5.3 P5.5 U1.9 U1.17 U2.4 U2.5 U2.6 U2.7 U2.9 U2.10 U2.11 U2.12 U2.13 U2.14 U2.17 U2.18 U2.19 U2.21 U2.22 U2.28 U2.29 U2.30 U2.31 U2.32 U2.37 U2.38 U2.41 U2.42 U2.43 U2.44 U2.45 U2.46 U2.47 U2.48 U2.52 U2.53 U2.54 U2.56 U2.57 U2.58 U2.59 U2.60 U2.61 U2.62 U2.63 U2.64 U3.2 U3.4 U3.6 U3.7 U3.9 U3.10 U4.6 U4.7 U4.9 U4.10 U5.6 U5.7 U5.9 U5.10 U6.6 U6.7 U6.9 U6.10 X1.2 X1.3 X1.4 X1.S1 X1.S2 X1.S3 X1.S4 X1.S5 X1.S6

## Polygon pours and split planes (outlines as drawn)
VOUT on Top Layer "VOUT" (solid, remove dead copper, pour order 4): 2.286,67.31 0.508,65.532 0.508,44.196 1.651,43.053 30.226,43.053 31.623,44.45 31.623,67.31
IOVDD_0 on Top Layer "VIN" (solid, remove dead copper, pour order 10): 0.508,40.894 2.032,42.418 32.258,42.418 32.258,66.04 33.528,67.31 43.18,67.31 43.18,0.635 2.159,0.635 0.508,2.286
GND on Bottom Layer "GND" (solid, remove dead copper, pour order 2): 2.286,67.31 0.508,65.532 0.508,2.159 2.159,0.508 41.148,0.508 43.18,2.54 43.18,65.151 41.021,67.31

## Silkscreen, mask and mechanical layers (free items; w line width, h text height)
Top Overlay:
  lines w0.254: 0,42.672 1.524,42.672 30.353,42.672 31.877,44.196 31.877,67.818
Outline:
  the board outline again, w0.254
Drill Drawing:
  lines w0.254: 69.146,25.881 70.84,25.881 70.84,27.574 69.146,27.574 69.146,25.881 ; 69.146,30.114 69.57,30.114 69.993,29.691 70.416,30.114 70.84,30.114 70.416,30.538 70.84,30.961 70.416,30.961 69.993,31.384 69.57,30.961 69.146,30.961 69.57,30.538 69.146,30.114 ; 69.146,33.501 70.84,33.501 70.84,35.194 69.146,35.194 69.146,33.501 ; 69.146,37.734 69.57,37.734 69.57,37.311 70.416,37.311 70.416,37.734 70.84,37.734 70.84,38.581 70.416,38.581 70.416,39.004 69.57,39.004 69.57,38.581 69.146,38.581 69.146,37.734 ; 69.146,41.121 69.993,41.544 70.84,41.121 70.416,41.968 70.84,42.814 69.993,42.391 69.146,42.814 69.57,41.968 69.146,41.121 ; 69.146,44.931 69.146,45.354 69.57,45.778 69.146,46.201 69.146,46.624 69.57,46.624 69.993,46.201 70.416,46.624 70.84,46.624 70.84,46.201 70.416,45.778 70.84,45.354 70.84,44.931 70.416,44.931 69.993,45.354 69.57,44.931 69.146,44.931 ; 69.146,50.434 70.84,50.434 69.993,48.741 69.146,50.434 ; 69.485,33.84 70.501,33.84 70.501,34.856 69.485,34.856 69.485,33.84
  lines w0.381: 67.627,24.738 347.559,24.738 ; 67.627,51.408 347.559,51.408 ; 81.62,20.928 81.62,55.218 ; 96.602,20.928 96.602,55.218 ; 124.534,20.928 124.534,55.218 ; 137.383,20.928 137.383,55.218 ; 156.021,20.928 156.021,55.218 ; 194.11,20.928 194.11,55.218 ; 209.092,20.928 209.092,55.218 ; 228.035,20.928 228.035,55.218 ; 256.983,20.928 256.983,55.218 ; 278.669,20.928 278.669,55.218 ; 312.542,20.928 312.542,55.218 ; 67.627,20.928 347.559,20.928 347.559,55.218 67.627,55.218 67.627,20.928
  text "Symbol" at 69.913,52.551 h1.83
  text "Count" at 82.763,52.551 h1.83
  text "Hole Size" at 97.745,52.551 h1.83
  text "Plated" at 125.677,52.551 h1.83
  text "Hole Type" at 138.526,52.551 h1.83
  text "Drill Layer Pair" at 157.164,52.551 h1.83
  text "Via/Pad" at 195.253,52.551 h1.83
  text "Pad Shape" at 210.235,52.551 h1.83
  text "Template" at 229.178,52.551 h1.83
  text "Description" at 258.126,52.551 h1.83
  text "Hole Tolerance (+)" at 279.812,52.551 h1.83
  text "Hole Tolerance (-)" at 313.685,52.551 h1.83
  text "2" at 82.763,48.741 h1.52
  text "25.59mil (0.650mm)" at 97.745,48.741 h1.52
  text "PTH" at 125.677,48.741 h1.52
  text "Slot" at 138.526,48.741 h1.52
  text "Top Layer - Bottom Layer" at 157.164,48.741 h1.52
  text "Pad" at 195.253,48.741 h1.52
  text "Rounded" at 210.235,48.741 h1.52
  text "r105_125h65_85r100" at 229.178,48.741 h1.52
  text "2" at 82.763,44.931 h1.52
  text "39.37mil (1.000mm)" at 97.745,44.931 h1.52
  text "PTH" at 125.677,44.931 h1.52
  text "Round" at 138.526,44.931 h1.52
  text "Top Layer - Bottom Layer" at 157.164,44.931 h1.52
  text "Pad" at 195.253,44.931 h1.52
  text "Rounded" at 210.235,44.931 h1.52
  text "c151h100" at 229.178,44.931 h1.52
  text "2" at 82.763,41.121 h1.52
  text "60.00mil (1.524mm)" at 97.745,41.121 h1.52
  text "PTH" at 125.677,41.121 h1.52
  text "Round" at 138.526,41.121 h1.52
  text "Top Layer - Bottom Layer" at 157.164,41.121 h1.52
  text "Pad" at 195.253,41.121 h1.52
  text "Rounded" at 210.235,41.121 h1.52
  text "c0h152x140_210" at 229.178,41.121 h1.52
  text "4" at 82.763,37.311 h1.52
  text "11.81mil (0.300mm)" at 97.745,37.311 h1.52
  text "PTH" at 125.677,37.311 h1.52
  text "Round" at 138.526,37.311 h1.52
  text "Top Layer - Bottom Layer" at 157.164,37.311 h1.52
  text "Pad" at 195.253,37.311 h1.52
  text "Rounded" at 210.235,37.311 h1.52
  text "c40h30" at 229.178,37.311 h1.52
  text "9" at 82.763,33.501 h1.52
  text "30.00mil (0.762mm)" at 97.745,33.501 h1.52
  text "PTH" at 125.677,33.501 h1.52
  text "Round" at 138.526,33.501 h1.52
  text "Top Layer - Bottom Layer" at 157.164,33.501 h1.52
  text "Pad" at 195.253,33.501 h1.52
  text "Rounded" at 210.235,33.501 h1.52
  text "(Mixed)" at 229.178,33.501 h1.52
  text "44" at 82.763,29.691 h1.52
  text "12.00mil (0.305mm)" at 97.745,29.691 h1.52
  text "PTH" at 125.677,29.691 h1.52
  text "Round" at 138.526,29.691 h1.52
  text "Top Layer - Bottom Layer" at 157.164,29.691 h1.52
  text "Via" at 195.253,29.691 h1.52
  text "Rounded" at 210.235,29.691 h1.52
  text "v61h30" at 229.178,29.691 h1.52
  text "59" at 82.763,25.881 h1.52
  text "35.43mil (0.900mm)" at 97.745,25.881 h1.52
  text "PTH" at 125.677,25.881 h1.52
  text "Round" at 138.526,25.881 h1.52
  text "Top Layer - Bottom Layer" at 157.164,25.881 h1.52
  text "Pad" at 195.253,25.881 h1.52
  text "(Mixed)" at 210.235,25.881 h1.52
  text "(Mixed)" at 229.178,25.881 h1.52
  text "122 Total" at 82.763,22.071 h1.52
  text "Slot definitions :" at 69.913,18.389 h1.52
  text "Routed Path Length" at 96.144,18.389 h1.52
  text "= Calculated from tool start centre position to tool end centre position." at 124.152,18.389 h1.52
  text "Hole Length" at 96.144,15.849 h1.52
  text "= Routed Path Length + Tool Size = Slot length as defined in the PCB layout" at 113.741,15.849 h1.52

## Dimensions
0,-1.778 to 43.688,-1.651 on Drill Drawing
45.847,0.508 to 45.593,67.818 on Drill Drawing